# EAGLE board main-2 4x4 (EAGLE 9.6.2), part 1 of 2
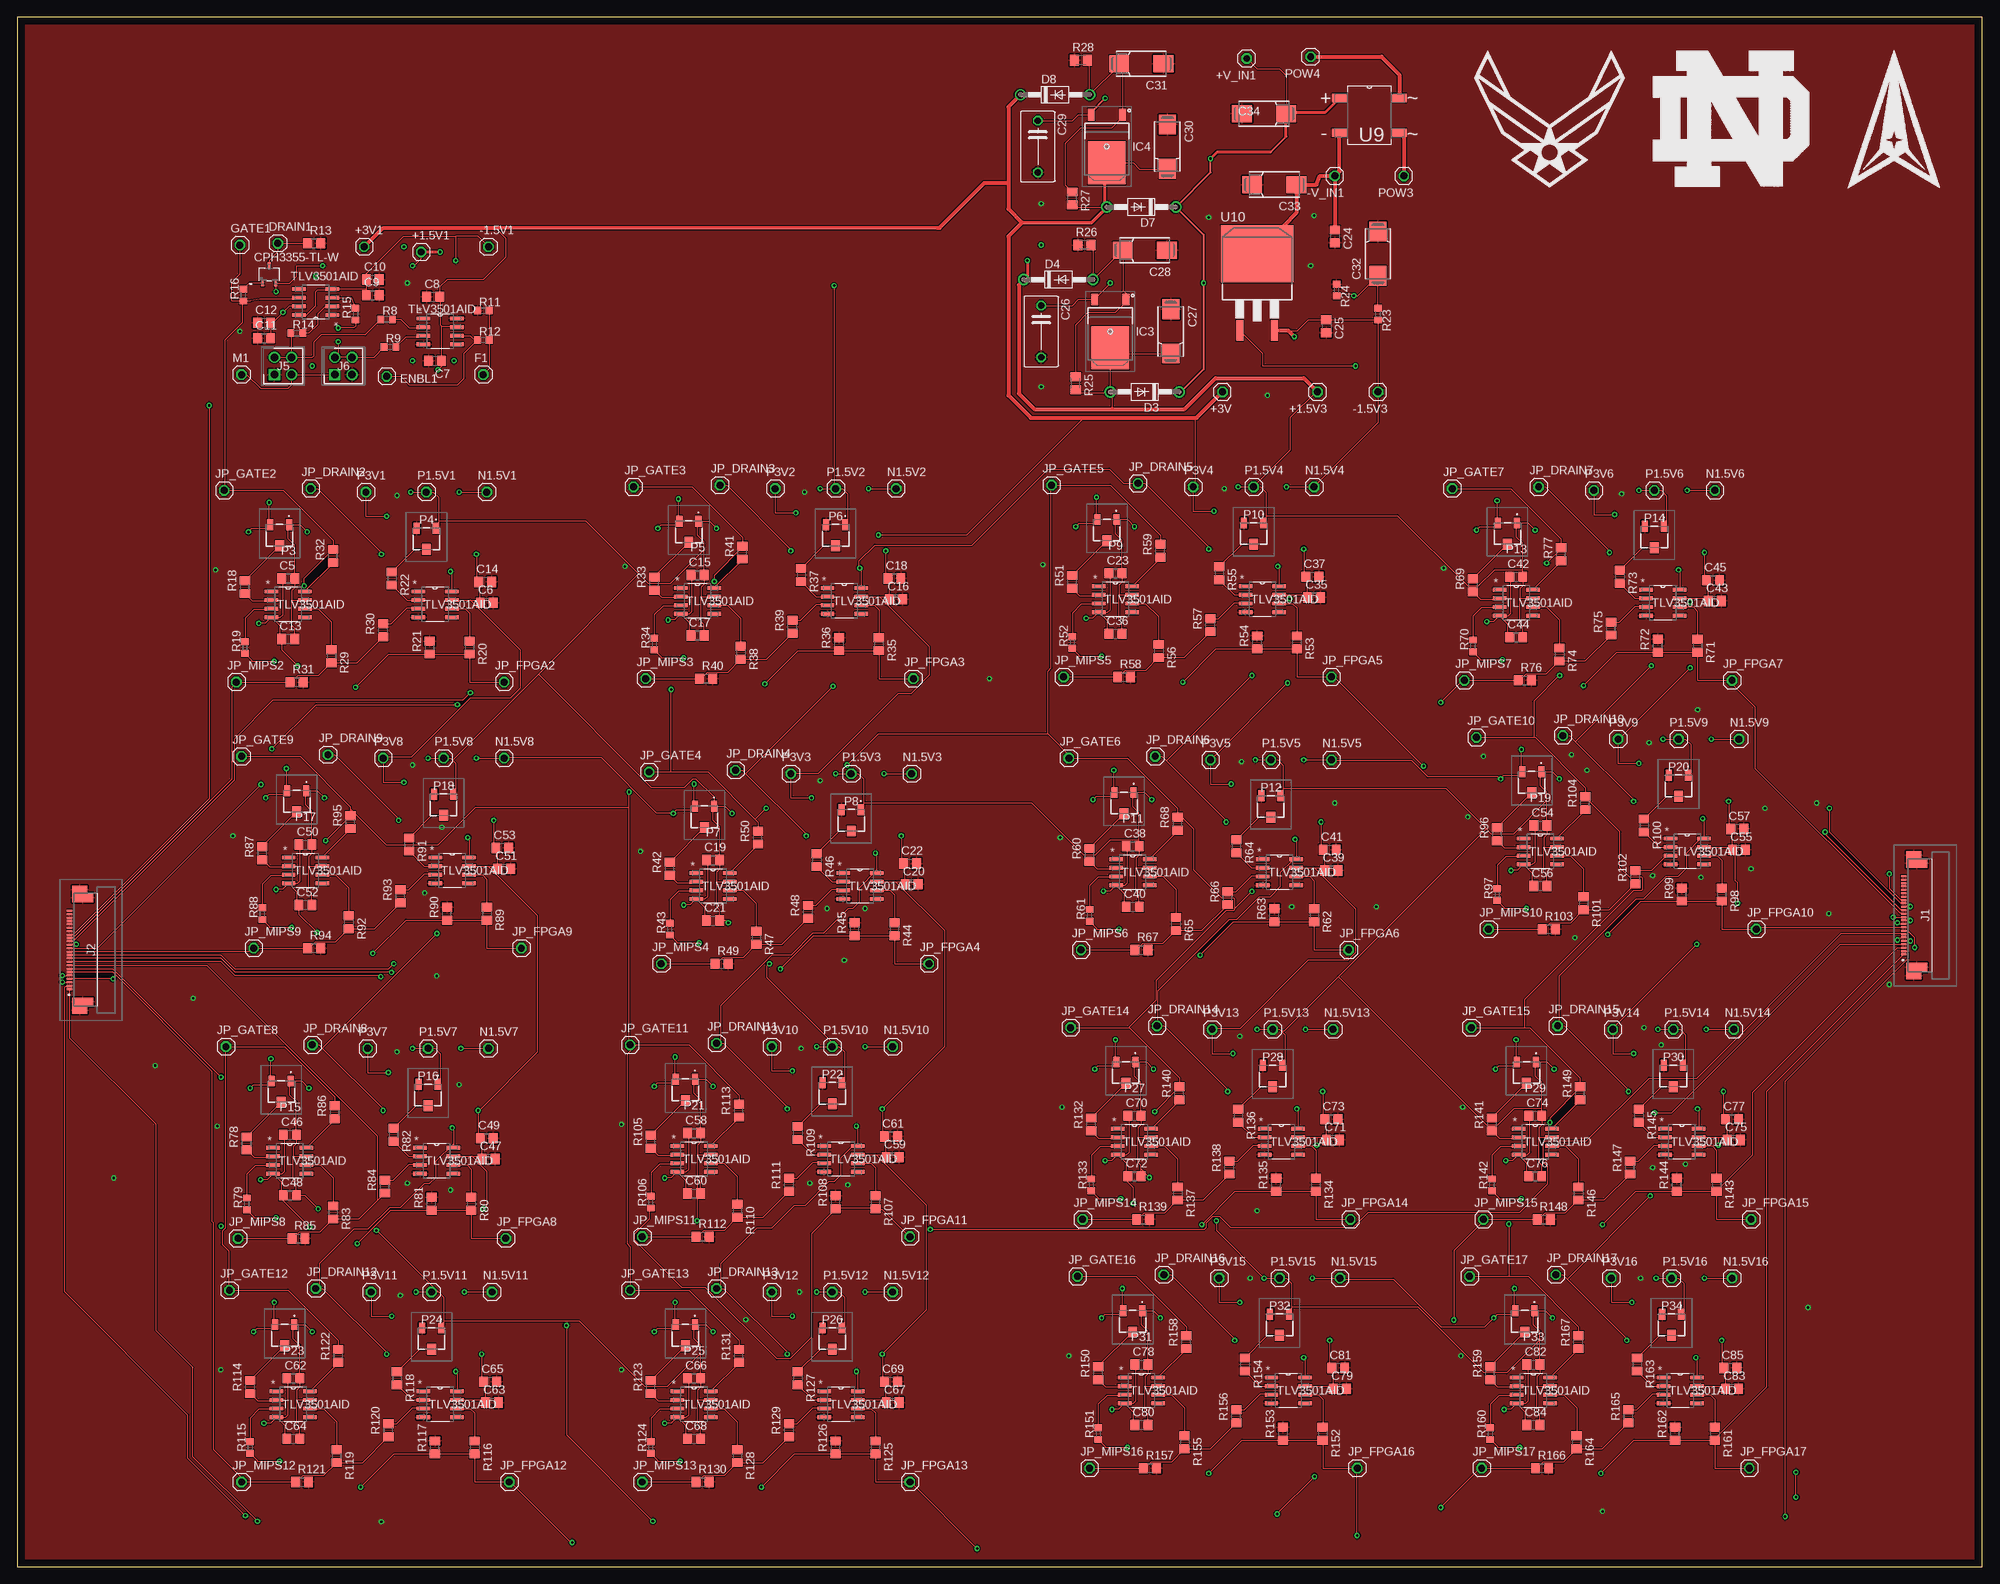
[diagram p0: board, top side]
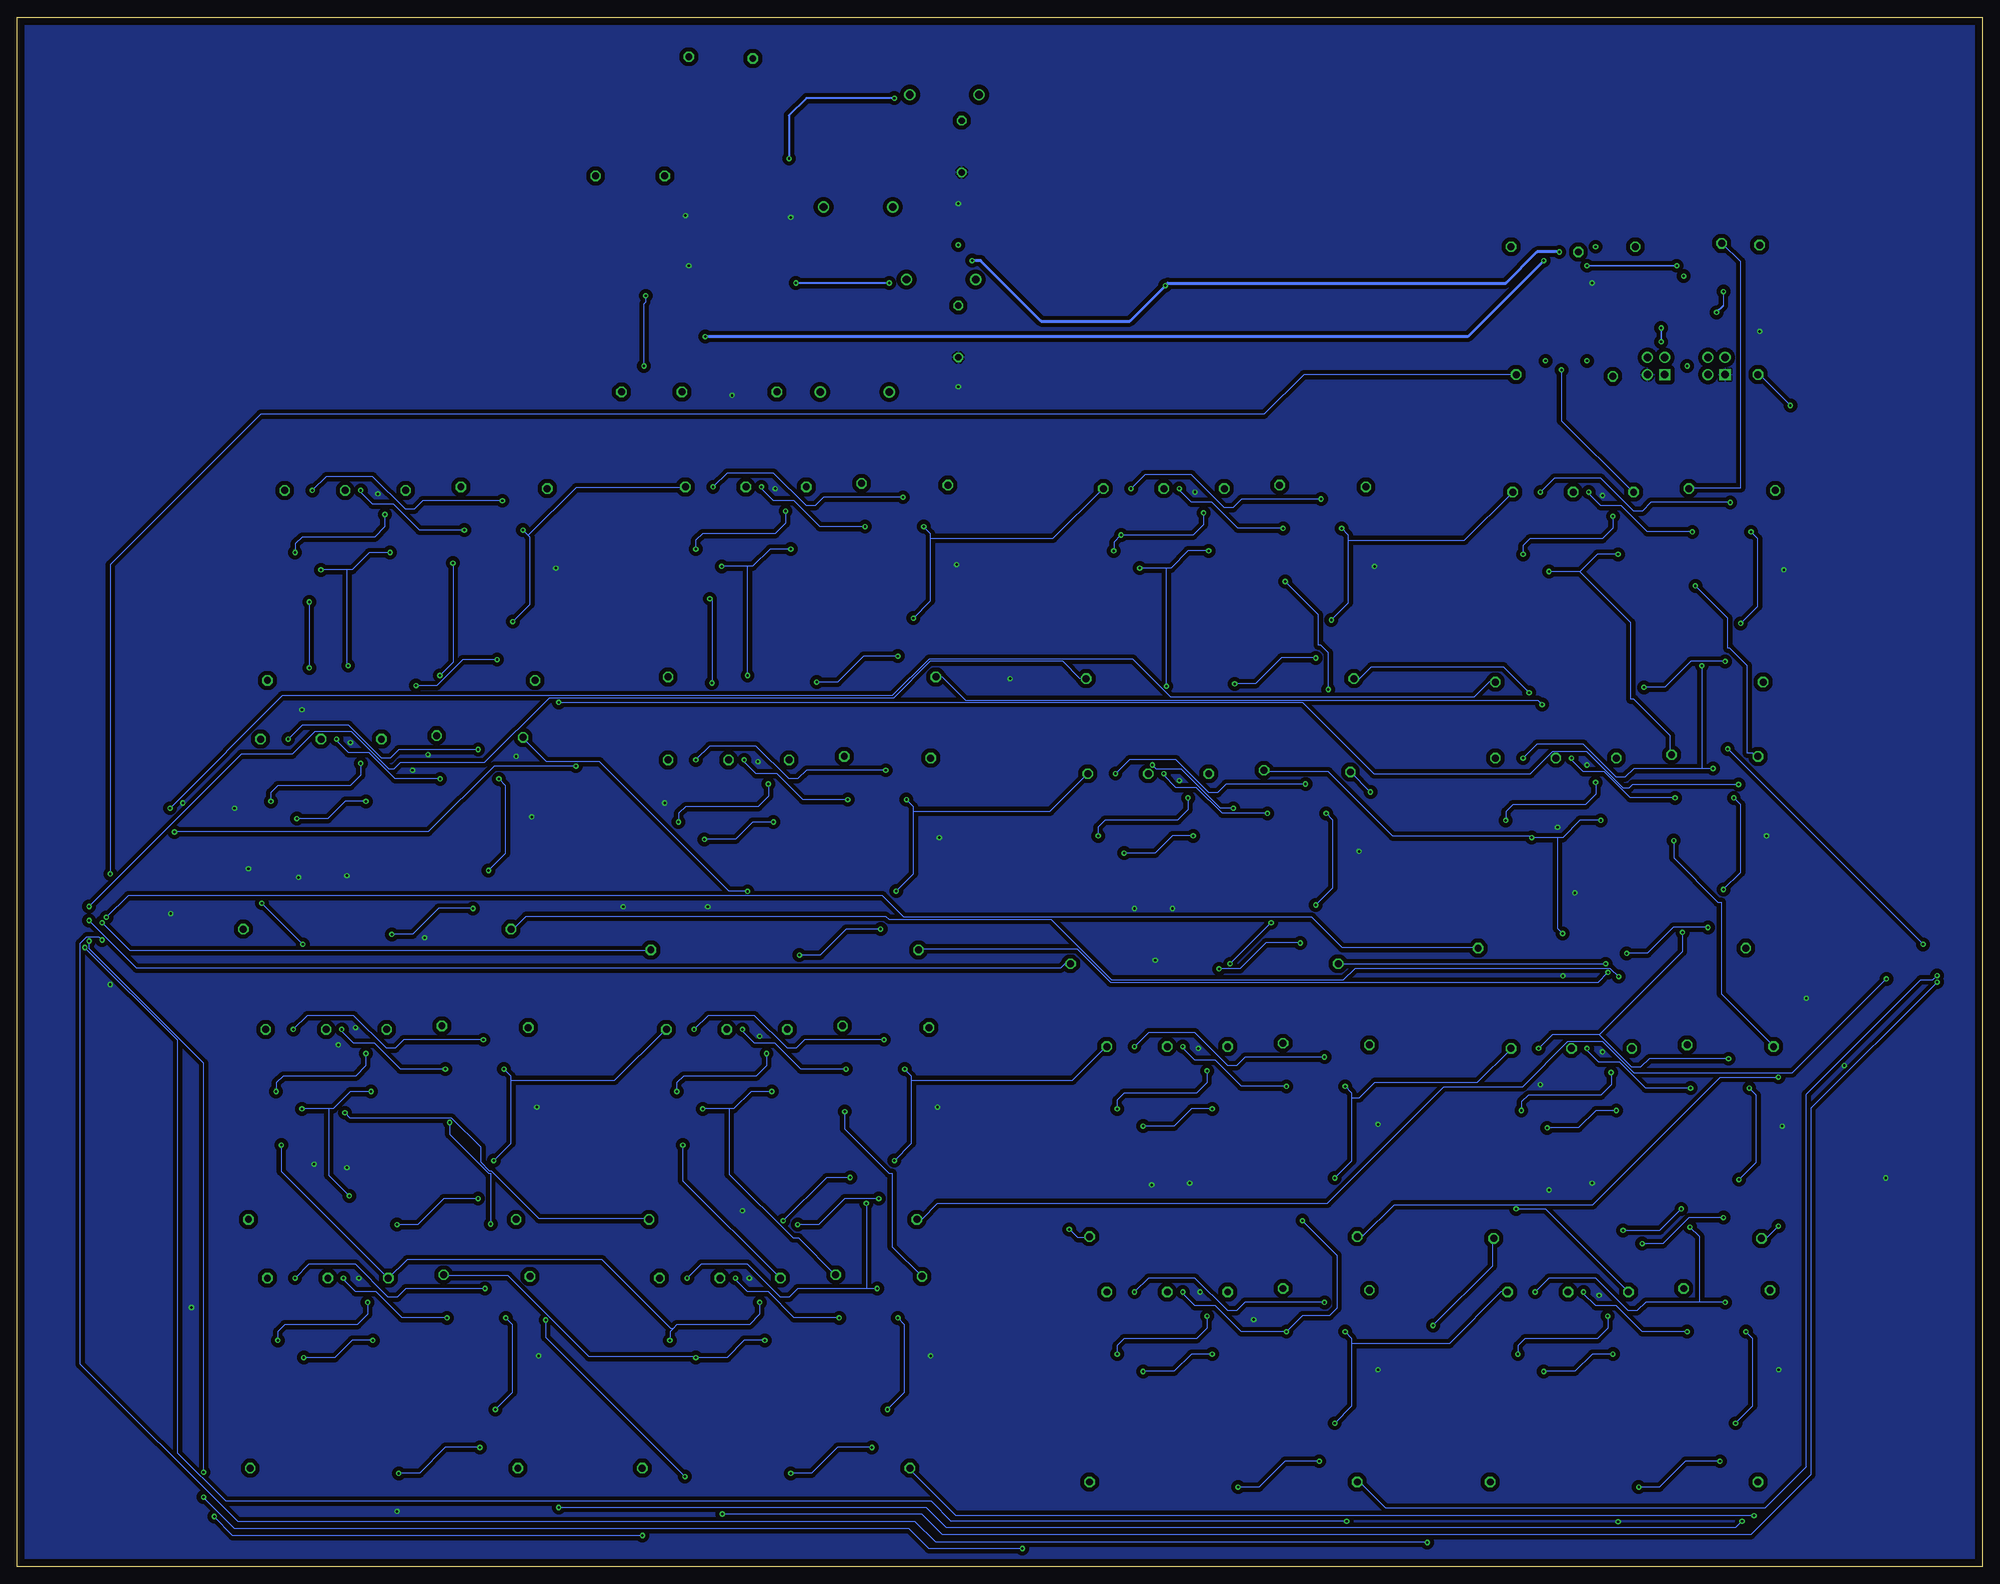
[diagram p1: board, bottom side, seen from below]

Size 289.05 x 227.84 mm. Coordinates in mm from the lower left corner, seen from the top.
Outline: 0,0 289.05,0 289.05,227.84 0,227.84 0,0
Copper layers (1*16): Top 0.035mm / dielectric 1.5mm / Bottom 0.035mm
Design rules "default": minimum track width 6mil, minimum drill 0.35mm, track to track 6mil, track to pad 6mil, pad to pad 6mil, via to via 6mil, smd to smd 6mil, copper to edge 40mil, drill to drill 6mil, minimum pad ring 10mil, minimum via ring 8mil, stop-mask expansion 4mil, vias tented up to drill 0mil, thermal gap 10mil

## Footprints (pad centres in the part's own frame; a part is rotated, then mirrored left to right if it is on the bottom)
1X01 = drill 1.016 octagon: 1 0,0
C0805 = smd 1.3 x 1.5: 1 -0.95,0; 2 0.95,0
C075-052X106 = drill 0.914 octagon: 1 -3.81,0; 2 3.81,0
085CS_1AR = smd 2.9 x 2.5: + 3.25,0; - -3.25,0
DO41-10 = drill 1.118: A 5.08,0; C -5.08,0
TO228P991X238-3N = smd 1.75 x 1: 1 -4.7,2.285; 3 -4.7,-2.285 | smd 6.35 x 5.55: 4 2.4,0
0524372471 = smd 0.3 x 0.8: 1 -5.75,1.925; 2 -5.25,1.925; 3 -4.75,1.925; 4 -4.25,1.925; 5 -3.75,1.925; 6 -3.25,1.925; 7 -2.75,1.925; 8 -2.25,1.925; 9 -1.75,1.925; 10 -1.25,1.925; 11 -0.75,1.925; 12 -0.25,1.925; 13 0.25,1.925; 14 0.75,1.925; 15 1.25,1.925; 16 1.75,1.925; 17 2.25,1.925; 18 2.75,1.925; 19 3.25,1.925; 20 3.75,1.925; 21 4.25,1.925; 22 4.75,1.925; 23 5.25,1.925; 24 5.75,1.925 | smd 1.3 x 3.05: MP1 -7.65,0; MP2 7.65,0 | smd 1.1 x 2.2: MP3 -8.85,0.425; MP4 8.85,0.425
HDRV4W64P254_2X2_521X508X851P = drill 1.1 pad 1.65 square: 1 0,0 | drill 1.1 pad 1.65: 2 0,2.54; 3 2.54,0; 4 2.54,2.54
SM3TW102 = smd 0.9 x 1.6: 1 -1.4,-1.56; 3 1.4,-1.56 | smd 1.3 x 1.6: 2 0,1.56
R0603 = smd 1 x 1.1: 1 -0.85,0; 2 0.85,0
R0805 = smd 1.3 x 1.5: 1 -0.95,0; 2 0.95,0
M0805 = smd 1.3 x 1.6: 1 -0.95,0; 2 0.95,0
D8 = smd 1.981 x 0.559: 1 -2.464,1.905; 2 -2.464,0.635; 3 -2.464,-0.635; 4 -2.464,-1.905; 5 2.464,-1.905; 6 2.464,-0.635; 7 2.464,0.635; 8 2.464,1.905
CPH3_2P9X1P6_ONS = smd 0.457 x 0.914: 1 -0.95,-1.295; 2 0.95,-1.295; 3 0,1.295
SOT508P985X260-4N = smd 2.235 x 1.245: 1 -4.394,2.54; 2 -4.394,-2.54; 3 4.394,-2.54; 4 4.394,2.54
D2PAK-3 = smd 1.016 x 3.05: 1 -2.54,-11.31; 3 2.54,-11.31 | smd 10.66 x 8.38: 4 0,0

## Placement (x,y rotation side)
+1.5V1  [1X01]  59.44,193.29 0 top
+1.5V3  [1X01]  191.26,172.72 180 top
+3V  [1X01]  177.29,172.72 180 top
+3V1  [1X01]  51.05,194.06 0 top
+V_IN1  [1X01]  180.85,221.74 180 top
-1.5V1  [1X01]  69.34,194.06 0 top
-1.5V3  [1X01]  200.15,172.72 180 top
-V_IN1  [1X01]  193.8,204.47 180 top
C5  [C0805]  39.88,145.29 0 top
C6  [C0805]  69.09,141.73 0 top
C7  [C0805]  61.47,177.29 0 top
C8  [C0805]  61.21,186.69 0 top
C9  [C0805]  52.32,186.94 0 top
C10  [C0805]  52.32,189.23 0 top
C11  [C0805]  36.32,180.59 0 top
C12  [C0805]  36.32,182.88 0 top
C13  [C0805]  39.88,136.4 0 top
C14  [C0805]  68.83,144.78 0 top
C15  [C0805]  100.08,145.8 0 top
C16  [C0805]  129.29,142.24 0 top
C17  [C0805]  100.08,136.91 0 top
C18  [C0805]  129.03,145.29 0 top
C19  [C0805]  102.36,103.89 0 top
C20  [C0805]  131.57,100.33 0 top
C21  [C0805]  102.36,95 0 top
C22  [C0805]  131.32,103.38 0 top
C23  [C0805]  161.54,146.05 0 top
C24  10uF  [C0805]  193.8,195.58 270 top
C25  0.1uF  [C0805]  192.53,182.37 270 top
C26  0.1uF  [C075-052X106]  150.62,181.61 270 top
C27  1uF  [085CS_1AR]  169.67,181.61 270 top
C28  10uF  [085CS_1AR]  165.86,193.55 180 top
C29  0.1uF  [C075-052X106]  150.11,208.79 270 top
C30  1uF  [085CS_1AR]  169.16,208.79 270 top
C31  10uF  [085CS_1AR]  165.35,220.98 180 top
C32  1uF  [085CS_1AR]  200.15,193.04 90 top
C33  10uF  [085CS_1AR]  184.91,203.2 180 top
C34  10uF  [085CS_1AR]  183.39,213.61 0 top
C35  [C0805]  190.75,142.49 0 top
C36  [C0805]  161.54,137.16 0 top
C37  [C0805]  190.5,145.54 0 top
C38  [C0805]  164.08,105.92 0 top
C39  [C0805]  193.29,102.36 0 top
C40  [C0805]  164.08,97.03 0 top
C41  [C0805]  193.04,105.41 0 top
C42  [C0805]  220.47,145.54 0 top
C43  [C0805]  249.68,141.99 0 top
C44  [C0805]  220.47,136.65 0 top
C45  [C0805]  249.43,145.03 0 top
C46  [C0805]  40.13,63.5 0 top
C47  [C0805]  69.34,59.94 0 top
C48  [C0805]  40.13,54.61 0 top
C49  [C0805]  69.09,62.99 0 top
C50  [C0805]  42.42,106.17 0 top
C51  [C0805]  71.63,102.62 0 top
C52  [C0805]  42.42,97.28 0 top
C53  [C0805]  71.37,105.66 0 top
C54  [C0805]  224.03,108.97 0 top
C55  [C0805]  253.24,105.41 0 top
C56  [C0805]  224.03,100.08 0 top
C57  [C0805]  252.98,108.46 0 top
C58  [C0805]  99.57,63.75 0 top
C59  [C0805]  128.78,60.2 0 top
C60  [C0805]  99.57,54.86 0 top
C61  [C0805]  128.52,63.25 0 top
C62  [C0805]  40.64,27.69 0 top
C63  [C0805]  69.85,24.13 0 top
C64  [C0805]  40.64,18.8 0 top
C65  [C0805]  69.6,27.18 0 top
C66  [C0805]  99.57,27.69 0 top
C67  [C0805]  128.78,24.13 0 top
C68  [C0805]  99.57,18.8 0 top
C69  [C0805]  128.52,27.18 0 top
C70  [C0805]  164.34,66.29 0 top
C71  [C0805]  193.55,62.74 0 top
C72  [C0805]  164.34,57.4 0 top
C73  [C0805]  193.29,65.79 0 top
C74  [C0805]  223.27,66.29 0 top
C75  [C0805]  252.48,62.74 0 top
C76  [C0805]  223.27,57.4 0 top
C77  [C0805]  252.22,65.79 0 top
C78  [C0805]  165.35,29.72 0 top
C79  [C0805]  194.56,26.16 0 top
C80  [C0805]  165.35,20.83 0 top
C81  [C0805]  194.31,29.21 0 top
C82  [C0805]  223.01,29.72 0 top
C83  [C0805]  252.22,26.16 0 top
C84  [C0805]  223.01,20.83 0 top
C85  [C0805]  251.97,29.21 0 top
D3  1N4002  [DO41-10]  165.86,172.72 180 top
D4  1N4002  [DO41-10]  153.16,189.23 0 top
D7  1N4002  [DO41-10]  165.35,199.9 180 top
D8  1N4002  [DO41-10]  152.65,216.41 0 top
DRAIN1  [1X01]  38.35,194.56 0 top
ENBL1  [1X01]  54.36,175.01 0 top
F1  [1X01]  68.58,175.26 0 top
GATE1  [1X01]  32.77,194.31 0 top
IC3  LM317AMDT_NOPB  [TO228P991X238-3N]  160.78,181.61 270 top
IC4  LM317AMDT_NOPB  [TO228P991X238-3N]  160.27,208.79 270 top
J1  0524372471  [0524372471]  279.4,95.76 90 top
J2  0524372471  [0524372471]  9.65,90.68 90 top
J5  70287-1098  [HDRV4W64P254_2X2_521X508X851P]  37.85,175.26 0 top
J6  70287-1098  [HDRV4W64P254_2X2_521X508X851P]  46.74,175.26 0 top
JP_DRAIN2  [1X01]  43.18,158.5 0 top
JP_DRAIN3  [1X01]  103.38,159 0 top
JP_DRAIN4  [1X01]  105.66,117.09 0 top
JP_DRAIN5  [1X01]  164.85,159.26 0 top
JP_DRAIN6  [1X01]  167.39,119.13 0 top
JP_DRAIN7  [1X01]  223.77,158.75 0 top
JP_DRAIN8  [1X01]  43.43,76.71 0 top
JP_DRAIN9  [1X01]  45.72,119.38 0 top
JP_DRAIN10  [1X01]  227.33,122.17 0 top
JP_DRAIN11  [1X01]  102.87,76.96 0 top
JP_DRAIN12  [1X01]  43.94,40.89 0 top
JP_DRAIN13  [1X01]  102.87,40.89 0 top
JP_DRAIN14  [1X01]  167.64,79.5 0 top
JP_DRAIN15  [1X01]  226.57,79.5 0 top
JP_DRAIN16  [1X01]  168.66,42.93 0 top
JP_DRAIN17  [1X01]  226.31,42.93 0 top
JP_FPGA2  [1X01]  71.63,130.05 0 top
JP_FPGA3  [1X01]  131.83,130.56 0 top
JP_FPGA4  [1X01]  134.11,88.65 0 top
JP_FPGA5  [1X01]  193.29,130.81 0 top
JP_FPGA6  [1X01]  195.83,90.68 0 top
JP_FPGA7  [1X01]  252.22,130.3 0 top
JP_FPGA8  [1X01]  71.88,48.26 0 top
JP_FPGA9  [1X01]  74.17,90.93 0 top
JP_FPGA10  [1X01]  255.78,93.73 0 top
JP_FPGA11  [1X01]  131.32,48.51 0 top
JP_FPGA12  [1X01]  72.39,12.45 0 top
JP_FPGA13  [1X01]  131.32,12.45 0 top
JP_FPGA14  [1X01]  196.09,51.05 0 top
JP_FPGA15  [1X01]  255.02,51.05 0 top
JP_FPGA16  [1X01]  197.1,14.48 0 top
JP_FPGA17  [1X01]  254.76,14.48 0 top
JP_GATE2  [1X01]  30.48,158.24 0 top
JP_GATE3  [1X01]  90.68,158.75 0 top
JP_GATE4  [1X01]  92.96,116.84 0 top
JP_GATE5  [1X01]  152.15,159 0 top
JP_GATE6  [1X01]  154.69,118.87 0 top
JP_GATE7  [1X01]  211.07,158.5 0 top
JP_GATE8  [1X01]  30.73,76.45 0 top
JP_GATE9  [1X01]  33.02,119.13 0 top
JP_GATE10  [1X01]  214.63,121.92 0 top
JP_GATE11  [1X01]  90.17,76.71 0 top
JP_GATE12  [1X01]  31.24,40.64 0 top
JP_GATE13  [1X01]  90.17,40.64 0 top
JP_GATE14  [1X01]  154.94,79.25 0 top
JP_GATE15  [1X01]  213.87,79.25 0 top
JP_GATE16  [1X01]  155.96,42.67 0 top
JP_GATE17  [1X01]  213.61,42.67 0 top
JP_MIPS2  [1X01]  32.26,130.05 0 top
JP_MIPS3  [1X01]  92.46,130.56 0 top
JP_MIPS4  [1X01]  94.74,88.65 0 top
JP_MIPS5  [1X01]  153.92,130.81 0 top
JP_MIPS6  [1X01]  156.46,90.68 0 top
JP_MIPS7  [1X01]  212.85,130.3 0 top
JP_MIPS8  [1X01]  32.51,48.26 0 top
JP_MIPS9  [1X01]  34.8,90.93 0 top
JP_MIPS10  [1X01]  216.41,93.73 0 top
JP_MIPS11  [1X01]  91.95,48.51 0 top
JP_MIPS12  [1X01]  33.02,12.45 0 top
JP_MIPS13  [1X01]  91.95,12.45 0 top
JP_MIPS14  [1X01]  156.72,51.05 0 top
JP_MIPS15  [1X01]  215.65,51.05 0 top
JP_MIPS16  [1X01]  157.73,14.48 0 top
JP_MIPS17  [1X01]  215.39,14.48 0 top
M1  [1X01]  33.02,175.26 0 top
N1.5V1  [1X01]  69.09,157.99 0 top
N1.5V2  [1X01]  129.29,158.5 0 top
N1.5V3  [1X01]  131.57,116.59 0 top
N1.5V4  [1X01]  190.75,158.75 0 top
N1.5V5  [1X01]  193.29,118.62 0 top
N1.5V6  [1X01]  249.68,158.24 0 top
N1.5V7  [1X01]  69.34,76.2 0 top
N1.5V8  [1X01]  71.63,118.87 0 top
N1.5V9  [1X01]  253.24,121.67 0 top
N1.5V10  [1X01]  128.78,76.45 0 top
N1.5V11  [1X01]  69.85,40.39 0 top
N1.5V12  [1X01]  128.78,40.39 0 top
N1.5V13  [1X01]  193.55,78.99 0 top
N1.5V14  [1X01]  252.48,78.99 0 top
N1.5V15  [1X01]  194.56,42.42 0 top
N1.5V16  [1X01]  252.22,42.42 0 top
P1.5V1  [1X01]  60.2,157.99 0 top
P1.5V2  [1X01]  120.4,158.5 0 top
P1.5V3  [1X01]  122.68,116.59 0 top
P1.5V4  [1X01]  181.86,158.75 0 top
P1.5V5  [1X01]  184.4,118.62 0 top
P1.5V6  [1X01]  240.79,158.24 0 top
P1.5V7  [1X01]  60.45,76.2 0 top
P1.5V8  [1X01]  62.74,118.87 0 top
P1.5V9  [1X01]  244.35,121.67 0 top
P1.5V10  [1X01]  119.89,76.45 0 top
P1.5V11  [1X01]  60.96,40.39 0 top
P1.5V12  [1X01]  119.89,40.39 0 top
P1.5V13  [1X01]  184.66,78.99 0 top
P1.5V14  [1X01]  243.59,78.99 0 top
P1.5V15  [1X01]  185.67,42.42 0 top
P1.5V16  [1X01]  243.33,42.42 0 top
P3  SM-3TW102  [SM3TW102]  38.61,151.64 180 top
P3V1  [1X01]  51.31,157.99 0 top
P3V2  [1X01]  111.51,158.5 0 top
P3V3  [1X01]  113.79,116.59 0 top
P3V4  [1X01]  172.97,158.75 0 top
P3V5  [1X01]  175.51,118.62 0 top
P3V6  [1X01]  231.9,158.24 0 top
P3V7  [1X01]  51.56,76.2 0 top
P3V8  [1X01]  53.85,118.87 0 top
P3V9  [1X01]  235.46,121.67 0 top
P3V10  [1X01]  111,76.45 0 top
P3V11  [1X01]  52.07,40.39 0 top
P3V12  [1X01]  111,40.39 0 top
P3V13  [1X01]  175.77,78.99 0 top
P3V14  [1X01]  234.7,78.99 0 top
P3V15  [1X01]  176.78,42.42 0 top
P3V16  [1X01]  234.44,42.42 0 top
P4  SM-3TW102  [SM3TW102]  60.2,151.13 180 top
P5  SM-3TW102  [SM3TW102]  98.81,152.15 180 top
P6  SM-3TW102  [SM3TW102]  120.4,151.64 180 top
P7  SM-3TW102  [SM3TW102]  101.09,110.24 180 top
P8  SM-3TW102  [SM3TW102]  122.68,109.73 180 top
P9  SM-3TW102  [SM3TW102]  160.27,152.4 180 top
P10  SM-3TW102  [SM3TW102]  181.86,151.89 180 top
P11  SM-3TW102  [SM3TW102]  162.81,112.27 180 top
P12  SM-3TW102  [SM3TW102]  184.4,111.76 180 top
P13  SM-3TW102  [SM3TW102]  219.2,151.89 180 top
P14  SM-3TW102  [SM3TW102]  240.79,151.38 180 top
P15  SM-3TW102  [SM3TW102]  38.86,69.85 180 top
P16  SM-3TW102  [SM3TW102]  60.45,69.34 180 top
P17  SM-3TW102  [SM3TW102]  41.15,112.52 180 top
P18  SM-3TW102  [SM3TW102]  62.74,112.01 180 top
P19  SM-3TW102  [SM3TW102]  222.76,115.32 180 top
P20  SM-3TW102  [SM3TW102]  244.35,114.81 180 top
P21  SM-3TW102  [SM3TW102]  98.3,70.1 180 top
P22  SM-3TW102  [SM3TW102]  119.89,69.6 180 top
P23  SM-3TW102  [SM3TW102]  39.37,34.04 180 top
P24  SM-3TW102  [SM3TW102]  60.96,33.53 180 top
P25  SM-3TW102  [SM3TW102]  98.3,34.04 180 top
P26  SM-3TW102  [SM3TW102]  119.89,33.53 180 top
P27  SM-3TW102  [SM3TW102]  163.07,72.64 180 top
P28  SM-3TW102  [SM3TW102]  184.66,72.14 180 top
P29  SM-3TW102  [SM3TW102]  222,72.64 180 top
P30  SM-3TW102  [SM3TW102]  243.59,72.14 180 top
P31  SM-3TW102  [SM3TW102]  164.08,36.07 180 top
P32  SM-3TW102  [SM3TW102]  185.67,35.56 180 top
P33  SM-3TW102  [SM3TW102]  221.74,36.07 180 top
P34  SM-3TW102  [SM3TW102]  243.33,35.56 180 top
POW3  [1X01]  203.96,204.47 180 top
POW4  [1X01]  190.25,222 180 top
R8  220  [R0603]  54.36,183.39 0 top
R9  220  [R0603]  54.86,179.32 0 top
R11  220  [R0603]  68.58,184.66 0 top
R12  220  [R0603]  68.58,180.34 0 top
R13  51  [R0805]  43.69,194.56 0 top
R14  220  [R0603]  41.15,181.36 0 top
R15  220  [R0603]  49.78,184.15 90 top
R16  220  [R0603]  33.27,186.94 90 top
R18  130  [R0805]  33.53,144.02 90 top
R19  130  [R0603]  33.53,135.13 90 top
R20  220  [R0805]  66.55,135.13 270 top
R21  220  [R0805]  60.71,135.13 90 top
R22  130  [R0805]  55.12,145.29 270 top
R23  240  [R0603]  200.15,184.15 270 top
R24  49.9  [R0603]  194.06,187.71 270 top
R25  240Ω  [M0805]  155.7,173.99 270 top
R26  49Ω  [M0805]  156.97,194.31 0 top
R27  240Ω  [M0805]  155.19,201.17 270 top
R28  390Ω  [M0805]  156.46,221.49 0 top
R29  220  [R0805]  46.23,133.86 270 top
R30  130  [R0805]  53.85,137.67 90 top
R31  220  [R0805]  41.15,130.05 0 top
R32  220  [R0805]  46.48,148.59 90 top
R33  130  [R0805]  93.73,144.53 90 top
R34  130  [R0603]  93.73,135.64 90 top
R35  220  [R0805]  126.75,135.64 270 top
R36  220  [R0805]  120.9,135.64 90 top
R37  130  [R0805]  115.32,145.8 270 top
R38  220  [R0805]  106.43,134.37 270 top
R39  130  [R0805]  114.05,138.18 90 top
R40  220  [R0805]  101.35,130.56 0 top
R41  220  [R0805]  106.68,149.1 90 top
R42  130  [R0805]  96.01,102.62 90 top
R43  130  [R0603]  96.01,93.73 90 top
R44  220  [R0805]  129.03,93.73 270 top
R45  220  [R0805]  123.19,93.73 90 top
R46  130  [R0805]  117.6,103.89 270 top
R47  220  [R0805]  108.71,92.46 270 top
R48  130  [R0805]  116.33,96.27 90 top
R49  220  [R0805]  103.63,88.65 0 top
R50  220  [R0805]  108.97,107.19 90 top
R51  130  [R0805]  155.19,144.78 90 top
R52  130  [R0603]  155.19,135.89 90 top
R53  220  [R0805]  188.21,135.89 270 top
R54  220  [R0805]  182.37,135.89 90 top
R55  130  [R0805]  176.78,146.05 270 top
R56  220  [R0805]  167.89,134.62 270 top
R57  130  [R0805]  175.51,138.43 90 top
R58  220  [R0805]  162.81,130.81 0 top
R59  220  [R0805]  168.15,149.35 90 top
R60  130  [R0805]  157.73,104.65 90 top
R61  130  [R0603]  157.73,95.76 90 top
R62  220  [R0805]  190.75,95.76 270 top
R63  220  [R0805]  184.91,95.76 90 top
R64  130  [R0805]  179.32,105.92 270 top
R65  220  [R0805]  170.43,94.49 270 top
R66  130  [R0805]  178.05,98.3 90 top
R67  220  [R0805]  165.35,90.68 0 top
R68  220  [R0805]  170.69,109.22 90 top
R69  130  [R0805]  214.12,144.27 90 top
R70  130  [R0603]  214.12,135.38 90 top
R71  220  [R0805]  247.14,135.38 270 top
R72  220  [R0805]  241.3,135.38 90 top
R73  130  [R0805]  235.71,145.54 270 top
R74  220  [R0805]  226.82,134.11 270 top
R75  130  [R0805]  234.44,137.92 90 top
R76  220  [R0805]  221.74,130.3 0 top
R77  220  [R0805]  227.08,148.84 90 top
R78  130  [R0805]  33.78,62.23 90 top
R79  130  [R0603]  33.78,53.34 90 top
R80  220  [R0805]  66.8,53.34 270 top
R81  220  [R0805]  60.96,53.34 90 top
R82  130  [R0805]  55.37,63.5 270 top
R83  220  [R0805]  46.48,52.07 270 top
R84  130  [R0805]  54.1,55.88 90 top
R85  220  [R0805]  41.4,48.26 0 top
R86  220  [R0805]  46.74,66.8 90 top
R87  130  [R0805]  36.07,104.9 90 top
R88  130  [R0603]  36.07,96.01 90 top
R89  220  [R0805]  69.09,96.01 270 top
R90  220  [R0805]  63.25,96.01 90 top
R91  130  [R0805]  57.66,106.17 270 top
R92  220  [R0805]  48.77,94.74 270 top
R93  130  [R0805]  56.39,98.55 90 top
R94  220  [R0805]  43.69,90.93 0 top
R95  220  [R0805]  49.02,109.47 90 top
R96  130  [R0805]  217.68,107.7 90 top
R97  130  [R0603]  217.68,98.81 90 top
R98  220  [R0805]  250.7,98.81 270 top
R99  220  [R0805]  244.86,98.81 90 top
R100  130  [R0805]  239.27,108.97 270 top
R101  220  [R0805]  230.38,97.54 270 top
R102  130  [R0805]  238,101.35 90 top
R103  220  [R0805]  225.3,93.73 0 top
R104  220  [R0805]  230.63,112.27 90 top
R105  130  [R0805]  93.22,62.48 90 top
R106  130  [R0603]  93.22,53.59 90 top
R107  220  [R0805]  126.24,53.59 270 top
R108  220  [R0805]  120.4,53.59 90 top
R109  130  [R0805]  114.81,63.75 270 top
R110  220  [R0805]  105.92,52.32 270 top
R111  130  [R0805]  113.54,56.13 90 top
R112  220  [R0805]  100.84,48.51 0 top
R113  220  [R0805]  106.17,67.06 90 top
R114  130  [R0805]  34.29,26.42 90 top
R115  130  [R0603]  34.29,17.53 90 top
R116  220  [R0805]  67.31,17.53 270 top
R117  220  [R0805]  61.47,17.53 90 top
R118  130  [R0805]  55.88,27.69 270 top
R119  220  [R0805]  46.99,16.26 270 top
R120  130  [R0805]  54.61,20.07 90 top
R121  220  [R0805]  41.91,12.45 0 top
R122  220  [R0805]  47.24,30.99 90 top
R123  130  [R0805]  93.22,26.42 90 top
R124  130  [R0603]  93.22,17.53 90 top
R125  220  [R0805]  126.24,17.53 270 top
R126  220  [R0805]  120.4,17.53 90 top
R127  130  [R0805]  114.81,27.69 270 top
R128  220  [R0805]  105.92,16.26 270 top
R129  130  [R0805]  113.54,20.07 90 top
R130  220  [R0805]  100.84,12.45 0 top
R131  220  [R0805]  106.17,30.99 90 top
R132  130  [R0805]  157.99,65.02 90 top
R133  130  [R0603]  157.99,56.13 90 top
R134  220  [R0805]  191.01,56.13 270 top
R135  220  [R0805]  185.17,56.13 90 top
R136  130  [R0805]  179.58,66.29 270 top
R137  220  [R0805]  170.69,54.86 270 top
R138  130  [R0805]  178.31,58.67 90 top
R139  220  [R0805]  165.61,51.05 0 top
R140  220  [R0805]  170.94,69.6 90 top
R141  130  [R0805]  216.92,65.02 90 top
R142  130  [R0603]  216.92,56.13 90 top
R143  220  [R0805]  249.94,56.13 270 top
R144  220  [R0805]  244.09,56.13 90 top
R145  130  [R0805]  238.51,66.29 270 top
R146  220  [R0805]  229.62,54.86 270 top
R147  130  [R0805]  237.24,58.67 90 top
R148  220  [R0805]  224.54,51.05 0 top
R149  220  [R0805]  229.87,69.6 90 top
R150  130  [R0805]  159,28.45 90 top
R151  130  [R0603]  159,19.56 90 top
R152  220  [R0805]  192.02,19.56 270 top
R153  220  [R0805]  186.18,19.56 90 top
R154  130  [R0805]  180.59,29.72 270 top
R155  220  [R0805]  171.7,18.29 270 top
R156  130  [R0805]  179.32,22.1 90 top
R157  220  [R0805]  166.62,14.48 0 top
R158  220  [R0805]  171.96,33.02 90 top
R159  130  [R0805]  216.66,28.45 90 top
R160  130  [R0603]  216.66,19.56 90 top
R161  220  [R0805]  249.68,19.56 270 top
R162  220  [R0805]  243.84,19.56 90 top
R163  130  [R0805]  238.25,29.72 270 top
R164  220  [R0805]  229.36,18.29 270 top
R165  130  [R0805]  236.98,22.1 90 top
R166  220  [R0805]  224.28,14.48 0 top
R167  220  [R0805]  229.62,33.02 90 top
U3  TLV3501AID  [D8]  39.88,141.48 0 top
U4  CPH3355-TL-W  [CPH3_2P9X1P6_ONS]  37.08,189.99 0 top
U5  TLV3501AID  [D8]  62.23,181.61 0 top
U6  TLV3501AID  [D8]  43.94,185.93 180 top
U7  TLV3501AID  [D8]  61.47,141.48 0 top
U8  TLV3501AID  [D8]  100.08,141.99 0 top
U9  DF10S  [SOT508P985X260-4N]  198.88,213.36 0 top
U10  MC79GENERICD2T  [D2PAK-3]  182.37,193.04 0 top
U11  TLV3501AID  [D8]  121.67,141.99 0 top
U12  TLV3501AID  [D8]  102.36,100.08 0 top
U13  TLV3501AID  [D8]  123.95,100.08 0 top
U14  TLV3501AID  [D8]  161.54,142.24 0 top
U15  TLV3501AID  [D8]  183.13,142.24 0 top
U16  TLV3501AID  [D8]  164.08,102.11 0 top
U17  TLV3501AID  [D8]  185.67,102.11 0 top
U18  TLV3501AID  [D8]  220.47,141.73 0 top
U19  TLV3501AID  [D8]  242.06,141.73 0 top
U20  TLV3501AID  [D8]  40.13,59.69 0 top
U21  TLV3501AID  [D8]  61.72,59.69 0 top
U22  TLV3501AID  [D8]  42.42,102.36 0 top
U23  TLV3501AID  [D8]  64.01,102.36 0 top
U24  TLV3501AID  [D8]  224.03,105.16 0 top
U25  TLV3501AID  [D8]  245.62,105.16 0 top
U26  TLV3501AID  [D8]  99.57,59.94 0 top
U27  TLV3501AID  [D8]  121.16,59.94 0 top
U28  TLV3501AID  [D8]  40.64,23.88 0 top
U29  TLV3501AID  [D8]  62.23,23.88 0 top
U30  TLV3501AID  [D8]  99.57,23.88 0 top
U31  TLV3501AID  [D8]  121.16,23.88 0 top
U32  TLV3501AID  [D8]  164.34,62.48 0 top
U33  TLV3501AID  [D8]  185.93,62.48 0 top
U34  TLV3501AID  [D8]  223.27,62.48 0 top
U35  TLV3501AID  [D8]  244.86,62.48 0 top
U36  TLV3501AID  [D8]  165.35,25.91 0 top
U37  TLV3501AID  [D8]  186.94,25.91 0 top
U38  TLV3501AID  [D8]  223.01,25.91 0 top
U39  TLV3501AID  [D8]  244.6,25.91 0 top

## Library data of the parts
+1.5V1 +1.5V3 +3V +3V1 +V_IN1 -1.5V1 -1.5V3 -V_IN1 DRAIN1 ENBL1 F1 GATE1 JP_DRAIN2-JP_DRAIN17 JP_FPGA2-JP_FPGA17 JP_GATE2-JP_GATE17 JP_MIPS2-JP_MIPS17 M1 N1.5V1-N1.5V16 P1.5V1-P1.5V16 P3V1-P3V16 POW3 POW4 = pinhead
C5-C26 C29 C35-C85 = rcl; SPICEPREFIX: C
C27 C28 C30-C34 R25-R28 = resistor
D3 D4 D7 D8 = diode
IC3 IC4 = LM317AMDT_NOPB; DESCRIPTION: 1% Accurate, 1.5A Adjustable Linear Regulator with Short Circuit Protection; HEIGHT: 2.38mm; MANUFACTURER_NAME: Texas Instruments; MANUFACTURER_PART_NUMBER: LM317AMDT/NOPB; MOUSER_PART_NUMBER: 926-LM317AMDT/NOPB; MOUSER_PRICE-STOCK: https://www.mouser.co.uk/ProductDetail/Texas-Instruments/LM317AMDT-NOPB?qs=X1J7HmVL2ZHvM%2FHpkMbGJg%3D%3D
J1 J2 = 0524372471; ARROW_PART_NUMBER: 0524372471; ARROW_PRICE-STOCK: https://www.arrow.com/en/products/0524372471/molex; DESCRIPTION: Conn FPC Connector SKT 24 POS 0.5mm Solder RA SMD Easy-On T/R; HEIGHT: 2.2mm; MANUFACTURER_NAME: Molex; MANUFACTURER_PART_NUMBER: 0524372471; MOUSER_PART_NUMBER: N/A; MOUSER_PRICE-STOCK: https://www.mouser.co.uk/ProductDetail/Molex/0524372471?qs=PBcRNPEHKspMGfgyTEmuOQ%3D%3D
J5 J6 = 70287-1098; DESCRIPTION: Headers & Wire Housings CGrid Bkwy Hdr DR Rt DR RtPn 15''SAu 4Ckt; HEIGHT: 8.51mm; MANUFACTURER_NAME: Molex; MANUFACTURER_PART_NUMBER: 70287-1098; MOUSER_PART_NUMBER: 538-70287-1098; MOUSER_PRICE-STOCK: https://www.mouser.co.uk/ProductDetail/Molex/70287-1098?qs=kYQSPAH4sJyJ%2F7vCw3ffjg%3D%3D
P3-P34 = SM-3TW102; DESCRIPTION: Trimmer Resistors - SMD 1 KW 3mm SMD multi turn J-lead, top adj., 11 turn; HEIGHT: 4.5mm; MANUFACTURER_NAME: NIDEC COPAL; MANUFACTURER_PART_NUMBER: SM-3TW102; MOUSER_PART_NUMBER: 229-SM-3TW102; MOUSER_PRICE-STOCK: https://www.mouser.co.uk/ProductDetail/Nidec-Copal/SM-3TW102?qs=XeJtXLiO41QfszlUsJazpw%3D%3D
R8 R9 R11-R16 R18-R24 R29-R167 = rcl; SPICEPREFIX: R
U3 U5-U8 U11-U39 = TLV3501; COPYRIGHT: Copyright (C) 2022 Ultra Librarian. All rights reserved.; DIGI-KEY_PART_NUMBER_1: 296-17921-5-ND; DIGI-KEY_PART_NUMBER_2: 2156-TLV3501AID-ND; MANUFACTURER_PART_NUMBER: TLV3501AID; MFR_NAME: Texas Instruments
U4 = CPH3355; COPYRIGHT: Copyright (C) 2022 Ultra Librarian. All rights reserved.; DIGI-KEY_PART_NUMBER_1: CPH3355-TL-WOSTR-ND; DIGI-KEY_PART_NUMBER_2: CPH3355-TL-WOSCT-ND; DIGI-KEY_PART_NUMBER_3: CPH3355-TL-WOSDKR-ND; MANUFACTURER_PART_NUMBER: CPH3355-TL-W; MFR_NAME: onsemi
U9 = DF10S; DESCRIPTION: Bridge Rectifier Single Phase Standard 1 kV Surface Mount 4-SDIP; DIGI-KEY_PART_NUMBER: DF10STR-ND; MF: ON; MP: DF10S; PACKAGE: SMD-4 ON; PURCHASE-URL: https://pricing.snapeda.com/search/part/DF10S/?ref=eda
U10 = _hhn_78xx_79xx_NCV78xx_d2pak_dpak

## Nets
+1.5V: +1.5V1.1 +1.5V3.1 C5.2 C11.2 C12.2 C13.2 C15.2 C17.2 C19.2 C21.2 C23.2 C27.+ C36.2 C38.2 C40.2 C42.2 C44.2 C46.2 C48.2 C50.2 C52.2 C54.2 C56.2 C58.2 C60.2 C62.2 C64.2 C66.2 C68.2 C70.2 C72.2 C74.2 C76.2 C78.2 C80.2 C82.2 C84.2 D3.A D4.C IC3.4 P1.5V1.1 P1.5V2.1 P1.5V3.1 P1.5V4.1 P1.5V5.1 P1.5V6.1 P1.5V7.1 P1.5V8.1 P1.5V9.1 P1.5V10.1 P1.5V11.1 P1.5V12.1 P1.5V13.1 P1.5V14.1 P1.5V15.1 P1.5V16.1 P3.1 P4.1 P5.1 P6.1 P7.1 P8.1 P9.1 P10.1 P11.1 P12.1 P13.1 P14.1 P15.1 P16.1 P17.1 P18.1 P19.1 P20.1 P21.1 P22.1 P23.1 P24.1 P25.1 P26.1 P27.1 P28.1 P29.1 P30.1 P31.1 P32.1 P33.1 P34.1 R25.2 U3.7 U4.2 U6.7 U8.7 U12.7 U14.7 U16.7 U18.7 U20.7 U22.7 U24.7 U26.7 U28.7 U30.7 U32.7 U34.7 U36.7 U38.7
+3V: +3V1.1 +3V.1 C6.1 C7.2 C8.2 C14.1 C16.1 C18.1 C20.1 C22.1 C30.+ C35.1 C37.1 C39.1 C41.1 C43.1 C45.1 C47.1 C49.1 C51.1 C53.1 C55.1 C57.1 C59.1 C61.1 C63.1 C65.1 C67.1 C69.1 C71.1 C73.1 C75.1 C77.1 C79.1 C81.1 C83.1 C85.1 D7.A D8.C IC4.4 P3V1.1 P3V2.1 P3V3.1 P3V4.1 P3V5.1 P3V6.1 P3V7.1 P3V8.1 P3V9.1 P3V10.1 P3V11.1 P3V12.1 P3V13.1 P3V14.1 P3V15.1 P3V16.1 R27.2 U5.7 U7.7 U11.7 U13.7 U15.7 U17.7 U19.7 U21.7 U23.7 U25.7 U27.7 U29.7 U31.7 U33.7 U35.7 U37.7 U39.7
-1.5V: -1.5V1.1 -1.5V3.1 C5.1 C9.1 C10.1 C13.1 C15.1 C17.1 C19.1 C21.1 C23.1 C25.1 C36.1 C38.1 C40.1 C42.1 C44.1 C46.1 C48.1 C50.1 C52.1 C54.1 C56.1 C58.1 C60.1 C62.1 C64.1 C66.1 C68.1 C70.1 C72.1 C74.1 C76.1 C78.1 C80.1 C82.1 C84.1 N1.5V1.1 N1.5V2.1 N1.5V3.1 N1.5V4.1 N1.5V5.1 N1.5V6.1 N1.5V7.1 N1.5V8.1 N1.5V9.1 N1.5V10.1 N1.5V11.1 N1.5V12.1 N1.5V13.1 N1.5V14.1 N1.5V15.1 N1.5V16.1 P3.3 P5.3 P7.3 P9.3 P11.3 P13.3 P15.3 P17.3 P19.3 P21.3 P23.3 P25.3 P27.3 P29.3 P31.3 P33.3 R23.2 U3.4 U6.4 U6.8 U8.4 U10.3 U12.4 U14.4 U16.4 U18.4 U20.4 U22.4 U24.4 U26.4 U28.4 U30.4 U32.4 U34.4 U36.4 U38.4
DIR_GATE: GATE1.1 JP_GATE2.1 JP_GATE3.1 JP_GATE4.1 JP_GATE5.1 JP_GATE6.1 JP_GATE7.1 JP_GATE8.1 JP_GATE9.1 JP_GATE10.1 JP_GATE11.1 JP_GATE12.1 JP_GATE13.1 JP_GATE14.1 JP_GATE15.1 JP_GATE16.1 JP_GATE17.1 R16.1 R32.2 R41.2 R50.2 R59.2 R68.2 R77.2 R86.2 R95.2 R104.2 R113.2 R122.2 R131.2 R140.2 R149.2 R158.2 R167.2 U6.6
F1: J1.1 JP_FPGA17.1 R160.1 R161.2 R162.1
F2: J1.2 JP_FPGA16.1 R151.1 R152.2 R153.1
F3: J1.3 JP_FPGA15.1 R142.1 R143.2 R144.1
F4: J1.4 JP_FPGA14.1 R133.1 R134.2 R135.1
F5: J1.5 JP_FPGA13.1 R124.1 R125.2 R126.1
F6: J1.6 JP_FPGA12.1 R115.1 R116.2 R117.1
F7: J1.7 JP_FPGA11.1 R106.1 R107.2 R108.1
F8: J1.8 JP_FPGA8.1 R79.1 R80.2 R81.1
F9: J1.9 JP_FPGA10.1 R97.1 R98.2 R99.1
F10: J1.10 JP_FPGA6.1 R61.1 R62.2 R63.1
F11: J1.11 JP_FPGA4.1 R43.1 R44.2 R45.1
F12: J1.12 JP_FPGA9.1 R88.1 R89.2 R90.1
F13: J1.13 JP_FPGA7.1 R70.1 R71.2 R72.1
F14: J1.14 JP_FPGA5.1 R52.1 R53.2 R54.1
F15: J1.15 JP_FPGA3.1 R34.1 R35.2 R36.1
F16: J1.16 JP_FPGA2.1 R19.1 R20.2 R21.1
F17: F1.1 J1.17 R11.2 R12.2
GND: C6.2 C7.1 C8.1 C9.2 C10.2 C11.1 C12.1 C14.2 C16.2 C18.2 C20.2 C22.2 C24.2 C25.2 C26.2 C27.- C28.- C29.2 C30.- C31.- C32.+ C33.+ C34.- C35.2 C37.2 C39.2 C41.2 C43.2 C45.2 C47.2 C49.2 C51.2 C53.2 C55.2 C57.2 C59.2 C61.2 C63.2 C65.2 C67.2 C69.2 C71.2 C73.2 C75.2 C77.2 C79.2 C81.2 C83.2 C85.2 J1.MP1 J1.MP2 J1.MP3 J1.MP4 J2.MP1 J2.MP2 J2.MP3 J2.MP4 J5.1 J6.3 P4.3 P6.3 P8.3 P10.3 P12.3 P14.3 P16.3 P18.3 P20.3 P22.3 P24.3 P26.3 P28.3 P30.3 P32.3 P34.3 R11.1 R13.2 R21.2 R24.1 R26.1 R28.1 R31.2 R36.2 R40.2 R45.2 R49.2 R54.2 R58.2 R63.2 R67.2 R72.2 R76.2 R81.2 R85.2 R90.2 R94.2 R99.2 R103.2 R108.2 R112.2 R117.2 R121.2 R126.2 R130.2 R135.2 R139.2 R144.2 R148.2 R153.2 R157.2 R162.2 R166.2 U5.4 U5.8 U7.4 U11.4 U13.4 U15.4 U17.4 U19.4 U21.4 U23.4 U25.4 U27.4 U29.4 U31.4 U33.4 U35.4 U37.4 U39.4
IN_2: POW3.1 U9.3
INPPOS1: +V_IN1.1 C26.1 C29.1 C34.+ D3.C D7.C IC3.3 IC4.3 U9.1
INV_DIR_DRAIN: DRAIN1.1 JP_DRAIN2.1 JP_DRAIN3.1 JP_DRAIN4.1 JP_DRAIN5.1 JP_DRAIN6.1 JP_DRAIN7.1 JP_DRAIN8.1 JP_DRAIN9.1 JP_DRAIN10.1 JP_DRAIN11.1 JP_DRAIN12.1 JP_DRAIN13.1 JP_DRAIN14.1 JP_DRAIN15.1 JP_DRAIN16.1 JP_DRAIN17.1 R13.1 U4.3 U7.8 U11.8 U13.8 U15.8 U17.8 U19.8 U21.8 U23.8 U25.8 U27.8 U29.8 U31.8 U33.8 U35.8 U37.8 U39.8
M1: J2.1 JP_MIPS17.1 R164.2 R165.1 R166.1
M2: J2.2 JP_MIPS16.1 R155.2 R156.1 R157.1
M3: J2.3 JP_MIPS15.1 R146.2 R147.1 R148.1
M4: J2.4 JP_MIPS14.1 R137.2 R138.1 R139.1
M5: J2.5 JP_MIPS13.1 R128.2 R129.1 R130.1
M6: J2.6 JP_MIPS12.1 R119.2 R120.1 R121.1
M7: J2.7 JP_MIPS11.1 R110.2 R111.1 R112.1
M8: J2.8 JP_MIPS8.1 R83.2 R84.1 R85.1
M9: J2.9 JP_MIPS10.1 R101.2 R102.1 R103.1
M10: J2.10 JP_MIPS6.1 R65.2 R66.1 R67.1
M11: J2.11 JP_MIPS4.1 R47.2 R48.1 R49.1
M12: J2.12 JP_MIPS9.1 R92.2 R93.1 R94.1
M13: J2.13 JP_MIPS7.1 R74.2 R75.1 R76.1
M14: J2.14 JP_MIPS5.1 R56.2 R57.1 R58.1
M15: J2.15 JP_MIPS3.1 R38.2 R39.1 R40.1
M16: J2.16 JP_MIPS2.1 R29.2 R30.1 R31.1
M17: J2.17 J5.3 J6.1 M1.1
N$2: P3.2 R18.2
N$3: R18.1 U3.2
N$4: R19.2 U3.3
N$5: R20.1 U7.6
N$6: P4.2 R22.1
N$7: R22.2 U7.2
N$8: R8.2 U5.2
N$9: R30.2 U7.3
N$10: R9.2 U5.3
N$11: ENBL1.1 R12.1 U5.6
N$12: J6.2 J6.4 R9.1 R15.1
N$13: J5.2 J5.4 R8.1 R14.1
N$14: R14.2 U6.2
N$15: R15.2 U6.3
N$16: R16.2 U4.1
N$17: R29.1 U3.6
N$18: R32.1 U3.8
N$19: P5.2 R33.2
N$20: R33.1 U8.2
N$21: R34.2 U8.3
N$22: C32.- R23.1 R24.2 U10.1
N$23: C28.+ D4.A IC3.1 R25.1 R26.2
N$24: C31.+ D8.A IC4.1 R27.1 R28.2
N$25: POW4.1 U9.4
N$26: -V_IN1.1 C24.1 C33.- U9.2 U10.4
N$35: R35.1 U11.6
N$36: P6.2 R37.1
N$37: R37.2 U11.2
N$38: R39.2 U11.3
N$39: R38.1 U8.6
N$40: R41.1 U8.8
N$41: P7.2 R42.2
N$42: R42.1 U12.2
N$43: R43.2 U12.3
N$44: R44.1 U13.6
N$45: P8.2 R46.1
N$46: R46.2 U13.2
N$47: R48.2 U13.3
N$48: R47.1 U12.6
N$49: R50.1 U12.8
N$50: P9.2 R51.2
N$51: R51.1 U14.2
N$52: R52.2 U14.3
N$53: R53.1 U15.6
N$54: P10.2 R55.1
N$55: R55.2 U15.2
N$56: R57.2 U15.3
N$57: R56.1 U14.6
N$58: R59.1 U14.8
N$59: P11.2 R60.2
N$60: R60.1 U16.2
N$61: R61.2 U16.3
N$62: R62.1 U17.6
N$63: P12.2 R64.1
N$64: R64.2 U17.2
N$65: R66.2 U17.3
N$66: R65.1 U16.6
N$67: R68.1 U16.8
N$68: P13.2 R69.2
N$69: R69.1 U18.2
N$70: R70.2 U18.3
N$71: R71.1 U19.6
N$72: P14.2 R73.1
N$73: R73.2 U19.2
N$74: R75.2 U19.3
N$75: R74.1 U18.6
N$76: R77.1 U18.8
N$77: P15.2 R78.2
N$78: R78.1 U20.2
N$79: R79.2 U20.3
N$80: R80.1 U21.6
N$81: P16.2 R82.1
N$82: R82.2 U21.2
N$83: R84.2 U21.3
N$84: R83.1 U20.6
N$85: R86.1 U20.8
N$86: P17.2 R87.2
N$87: R87.1 U22.2
N$88: R88.2 U22.3
N$89: R89.1 U23.6
N$90: P18.2 R91.1
N$91: R91.2 U23.2
N$92: R93.2 U23.3
N$93: R92.1 U22.6
N$94: R95.1 U22.8
N$95: P19.2 R96.2
N$96: R96.1 U24.2
N$97: R97.2 U24.3
N$98: R98.1 U25.6
N$99: P20.2 R100.1
N$100: R100.2 U25.2
N$101: R102.2 U25.3
N$102: R101.1 U24.6
N$103: R104.1 U24.8
N$104: P21.2 R105.2
N$105: R105.1 U26.2
N$106: R106.2 U26.3
N$107: R107.1 U27.6
N$108: P22.2 R109.1
N$109: R109.2 U27.2
N$110: R111.2 U27.3
N$111: R110.1 U26.6
N$112: R113.1 U26.8
N$113: P23.2 R114.2
N$114: R114.1 U28.2
N$115: R115.2 U28.3
N$116: R116.1 U29.6
N$117: P24.2 R118.1
N$118: R118.2 U29.2
N$119: R120.2 U29.3
N$120: R119.1 U28.6
N$121: R122.1 U28.8
N$122: P25.2 R123.2
N$123: R123.1 U30.2
N$124: R124.2 U30.3
N$125: R125.1 U31.6
N$126: P26.2 R127.1
N$127: R127.2 U31.2
N$128: R129.2 U31.3
N$129: R128.1 U30.6
N$130: R131.1 U30.8
N$131: P27.2 R132.2
N$132: R132.1 U32.2
N$133: R133.2 U32.3
N$134: R134.1 U33.6
N$135: P28.2 R136.1
N$136: R136.2 U33.2
N$137: R138.2 U33.3
N$138: R137.1 U32.6
N$139: R140.1 U32.8
N$140: P29.2 R141.2
N$141: R141.1 U34.2
N$142: R142.2 U34.3
N$143: R143.1 U35.6
N$144: P30.2 R145.1
N$145: R145.2 U35.2
N$146: R147.2 U35.3
N$147: R146.1 U34.6
N$148: R149.1 U34.8
N$149: P31.2 R150.2
N$150: R150.1 U36.2
N$151: R151.2 U36.3
N$152: R152.1 U37.6
N$153: P32.2 R154.1
N$154: R154.2 U37.2
N$155: R156.2 U37.3
N$156: R155.1 U36.6
N$157: R158.1 U36.8
N$158: P33.2 R159.2
N$159: R159.1 U38.2
N$160: R160.2 U38.3
N$161: R161.1 U39.6
N$162: P34.2 R163.1
N$163: R163.2 U39.2
N$164: R165.2 U39.3
N$165: R164.1 U38.6
N$166: R167.1 U38.8

## Tracks (layer width: path | path; a pad name or v marks a point on that pad's centre or on a via)
+1.5V  (via drill 0.35)
  Top 0.152: U6.7 40.01,185.29 v39.12,184.4 37.85,183.13 37.53,183.13 C12.2 C11.2 | v38.1,187.45 38.03,187.52 U4.2 40.11,188.7 41.15,189.74 41.15,191.26 v44.96,191.26 | v58.17,191.26 58.42,191.26 59.44,192.28 +1.5V1.1 | 160.91,172.59 D3.A 160.78,178.31 161.04,178.56 161.04,178.96 IC3.4 161.68,178.31 169.62,178.31 C27.+ | 160.91,172.59 161.04,172.47 161.04,170.18 | R25.2 156.15,172.59 160.91,172.59 | C13.2 40.83,137.99 40.39,138.43 40.39,142.11 | 40.39,142.11 U3.7 | 40.39,142.11 40.39,143.51 40.83,143.95 C5.2 40.83,150.18 39.88,151.13 39.88,153.07 P3.1 41.62,153.2 v42.67,152.15 | 61.98,153.73 61.98,157.23 61.21,157.99 P1.5V1.1 v57.91,157.99 | 61.98,153.73 61.98,153.07 P4.1 | C17.2 101.03,138.5 100.58,138.94 100.58,142.62 | 100.58,142.62 U8.7 | 100.58,142.62 100.58,144.02 101.03,144.46 C15.2 101.03,149.45 | 101.03,149.45 101.03,150.69 100.08,151.64 100.08,153.58 P5.1 101.82,153.71 v102.87,152.65 | P6.1 122.17,153.58 122.17,157.73 121.41,158.5 P1.5V2.1 120.17,158.5 | v118.11,158.5 120.17,158.5 | C36.2 162.49,138.75 162.05,139.19 162.05,142.88 | 162.05,142.88 U14.7 | 162.05,142.88 162.05,144.27 162.49,144.71 C23.2 162.49,150.94 161.54,151.89 161.54,153.83 P9.1 163.29,153.96 v164.34,152.91 | P1.5V4.1 182.88,158.75 183.64,157.99 183.64,154.53 | 183.64,154.53 183.64,153.83 P10.1 | v179.58,158.75 P1.5V4.1 | C44.2 221.42,138.24 220.98,138.68 220.98,142.37 | 220.98,142.37 U18.7 | 220.98,142.37 220.98,143.76 221.42,144.21 C42.2 221.42,146.59 | 221.42,146.59 221.42,150.43 220.47,151.38 220.47,153.32 P13.1 222.21,153.45 v223.27,152.4 | P14.1 242.57,153.32 242.57,157.48 241.81,158.24 P1.5V6.1 v238.51,158.24
  Top 0.152: C52.2 43.37,98.87 42.93,99.31 42.93,103 | 42.93,103 U22.7 | 42.93,103 42.93,104.39 43.37,104.84 C50.2 43.37,111.06 42.42,112.01 42.42,113.95 P17.1 44.16,114.08 v45.21,113.03 | 63.98,118.65 63.75,118.87 P1.5V8.1 v60.45,118.87 | 63.98,118.65 64.52,118.11 64.52,113.95 P18.1 | 102.87,100.71 102.87,97.03 103.31,96.59 C21.2 104.3,95 v104.62,94.68 | 102.87,100.71 U12.7 | 102.87,100.71 102.87,102.11 103.31,102.55 C19.2 103.31,108.78 102.36,109.73 102.36,111.67 P7.1 | 124.46,112.3 124.46,115.82 123.7,116.59 P1.5V3.1 v120.4,116.59 | 124.46,112.3 124.46,111.67 P8.1 | P7.1 104.1,111.8 v105.16,110.74 | C40.2 165.03,98.62 164.59,99.06 164.59,102.74 | 164.59,102.74 U16.7 | 164.59,102.74 164.59,104.14 165.03,104.58 C38.2 165.03,106.9 | 165.03,106.9 165.03,110.81 164.08,111.76 164.08,113.7 P11.1 165.83,113.83 v166.88,112.78 | 186.18,114.36 186.18,117.86 185.42,118.62 P1.5V5.1 v182.12,118.62 | 186.18,114.36 186.18,113.7 P12.1 | C56.2 224.98,101.67 224.54,102.11 224.54,105.79 | 224.54,105.79 U24.7 | 224.54,105.79 224.54,107.19 224.98,107.63 C54.2 224.98,112.62 | 224.98,112.62 224.98,113.86 224.03,114.81 224.03,116.75 P19.1 225.77,116.88 v226.82,115.82 | P20.1 246.13,116.75 246.13,120.9 245.36,121.67 P1.5V9.1 v242.06,121.67 | 40.64,60.33 40.64,56.64 41.08,56.2 C48.2 41.12,54.52 42.39,54.52 v44.29,52.61 | 40.64,60.33 U20.7 | 40.64,60.33 40.64,61.72 41.08,62.16 C46.2 41.08,68.39 40.13,69.34 40.13,71.28 P15.1 41.87,71.41 v42.93,70.36 | P16.1 62.23,71.28 62.23,75.44 61.47,76.2 P1.5V7.1 v58.17,76.2 | C60.2 100.52,56.45 100.08,56.9 | 100.08,56.9 100.08,60.58 | 100.08,60.58 U26.7 | 100.08,60.58 100.08,61.98 100.52,62.42 C58.2 100.52,68.65 99.57,69.6 99.57,71.53 P21.1 101.31,71.66 v102.36,70.61
  Top 0.152: P1.5V10.1 120.9,76.45 121.67,75.69 121.67,71.53 P22.1 | v117.6,76.45 P1.5V10.1 | C64.2 41.59,20.39 41.15,20.83 41.15,24.51 | 41.15,24.51 U28.7 | 41.15,24.51 41.15,25.91 41.59,26.35 C62.2 41.59,32.58 40.64,33.53 40.64,35.47 P23.1 42.38,35.6 v43.43,34.54 | 61.91,40.39 P1.5V11.1 v58.67,40.39 | 61.91,40.39 61.98,40.39 62.74,39.62 62.74,36.1 | 62.74,36.1 62.74,35.47 P24.1 | C68.2 100.52,20.39 100.08,20.83 100.08,24.51 | 100.08,24.51 U30.7 | 100.08,24.51 100.08,25.91 100.52,26.35 C66.2 100.52,31.34 | 100.52,31.34 100.52,32.58 99.57,33.53 99.57,35.47 P25.1 101.31,35.6 v102.36,34.54 | P26.1 121.67,35.47 121.67,39.62 120.9,40.39 P1.5V12.1 v117.6,40.39 | C72.2 165.29,58.48 | 165.29,58.48 165.29,58.99 164.85,59.44 164.85,63.12 | 164.85,63.12 U32.7 | 164.85,63.12 164.85,64.52 165.29,64.96 C70.2 165.29,71.19 164.34,72.14 164.34,74.07 P27.1 166.08,74.2 v167.13,73.15 | 185.88,78.79 185.67,78.99 P1.5V13.1 v182.37,78.99 | 185.88,78.79 186.44,78.23 186.44,74.07 P28.1 | C76.2 224.22,58.99 223.77,59.44 223.77,63.12 | 223.77,63.12 U34.7 | 223.77,63.12 223.77,64.52 224.22,64.96 C74.2 224.22,67.37 | 224.22,67.37 224.22,71.19 223.27,72.14 223.27,74.07 P29.1 225.01,74.2 v226.06,73.15 | P30.1 245.36,74.07 245.36,78.23 244.6,78.99 P1.5V14.1 v241.3,78.99 | C80.2 166.3,22.42 165.86,22.86 165.86,26.54 | 165.86,26.54 U36.7 | 165.86,26.54 165.86,27.94 166.3,28.38 C78.2 166.3,34.61 165.35,35.56 165.35,37.5 P31.1 167.1,37.63 v168.15,36.58 | 187.45,38.16 187.45,41.66 186.69,42.42 P1.5V15.1 v183.39,42.42 176.37,49.44 v176.37,50.86 | 187.45,38.16 187.45,37.5 P32.1 | C84.2 223.96,22.42 223.52,22.86 223.52,26.54
  Top 0.152: 223.52,26.54 U38.7 | 223.52,26.54 223.52,27.94 223.96,28.38 C82.2 223.96,33.4 | 223.96,33.4 223.96,34.61 223.01,35.56 223.01,37.5 P33.1 224.75,37.63 v225.81,36.58 | P34.1 245.11,37.5 245.11,41.66 244.35,42.42 P1.5V16.1 v241.05,42.42 | 61.98,153.73 83.66,153.73 91.44,145.95 | 91.44,145.95 92.87,144.53 96.04,144.53 100.97,149.45 101.03,149.45 | 76.68,131.19 64.14,118.65 63.98,118.65 | 76.68,131.19 91.44,145.95 | 221.42,146.59 217.33,146.59 214.95,144.21 213.36,144.21 203.04,154.53 183.64,154.53 | P1.5V4.1 187.23,164.12 187.23,168.94 191.13,172.85 +1.5V3.1 | v120.17,188.34 120.17,158.5 | 186.18,114.36 210.19,114.36 216.06,108.49 | 216.06,108.49 216.85,107.7 220.03,107.7 224.95,112.62 224.98,112.62 | 187.45,38.16 206.06,38.16 215.74,28.48 219.07,28.48 224,33.4 223.96,33.4 | v166.53,57.21 165.26,58.48 165.29,58.48 | 194.31,86.74 186.37,78.8 185.9,78.8 185.88,78.79 | 194.31,86.74 216.06,108.49 | 224.22,67.37 220.19,67.37 217.81,64.99 216.06,64.99 194.31,86.74 | 62.74,36.1 82.71,36.1 92.39,26.42 95.57,26.42 100.49,31.34 100.52,31.34 | v100.01,50.86 100.01,56.9 100.08,56.9 | 61.91,40.39 v52.86,49.44 | v110.65,88.65 110.33,88.33 110.33,86.58 120.49,76.42 P1.5V10.1 | 165.03,106.9 160.81,106.9 158.59,104.68 156.84,104.68 149.22,112.3 124.46,112.3 | 76.68,131.19 93.34,114.52 98.11,114.52 99.38,115.79 99.85,115.79 102.55,113.09 102.55,111.82 P7.1 | 147.32,188.4 147.95,189.04 D4.C 148.27,189.36 148.59,189.67 148.59,189.74
  Top 0.406: +1.5V1.1 v62.23,193.29 | v148.59,192.02 148.59,189.74
  Top 0.61: 147.32,188.4 147.32,172.47 149.61,170.18 161.04,170.18 171.7,170.18 176.28,174.75 189.23,174.75 191.13,172.85
  Bottom 0.152: v38.1,187.45 38.1,185.42 | v57.91,157.99 57.91,157.73 56.13,155.96 53.09,155.96 49.28,152.15 v42.67,152.15 | v118.11,158.5 118.11,158.24 116.33,156.46 113.28,156.46 109.47,152.65 v102.87,152.65 | v179.58,158.75 179.58,158.5 177.8,156.72 174.75,156.72 170.94,152.91 v164.34,152.91 | v238.51,158.24 238.51,157.99 236.73,156.21 233.68,156.21 229.87,152.4 v223.27,152.4 | v60.45,118.87 60.45,118.62 58.67,116.84 55.63,116.84 51.82,113.03 v45.21,113.03 | v120.4,116.59 120.4,116.33 118.62,114.55 115.57,114.55 111.76,110.74 v105.16,110.74 | v182.12,118.62 182.12,118.36 180.34,116.59 177.29,116.59 173.48,112.78 v166.88,112.78 | v242.06,121.67 242.06,121.41 240.28,119.63 237.24,119.63 233.43,115.82 v226.82,115.82 | v58.17,76.2 58.17,75.95 56.39,74.17 53.34,74.17 49.53,70.36 v42.93,70.36 | v117.6,76.45 117.6,76.2 115.82,74.42 112.78,74.42 108.97,70.61 v102.36,70.61 | v58.67,40.39 58.67,40.13 56.9,38.35 53.85,38.35 50.04,34.54 v43.43,34.54 | v117.6,40.39 117.6,40.13 115.82,38.35 112.78,38.35 108.97,34.54 v102.36,34.54 100.01,36.89 96.04,36.89 94.93,38 94.93,45.78 v100.01,50.86 | v182.37,78.99 182.37,78.74 180.59,76.96 177.55,76.96 173.74,73.15 v167.13,73.15 | v241.3,78.99 241.3,78.74 239.52,76.96 236.47,76.96 232.66,73.15 v226.06,73.15 | v183.39,42.42 183.39,42.16 181.61,40.39 178.56,40.39 174.75,36.58 v168.15,36.58 | v241.05,42.42 241.05,42.16 239.27,40.39 236.22,40.39 232.41,36.58 v225.81,36.58 | v176.37,50.86 170.02,57.21 v166.53,57.21 | v44.29,52.61 47.47,49.44 v52.86,49.44 | v110.65,88.65 v104.62,94.68
  Bottom 0.203: 38.1,185.42 v39.12,184.4 | v44.96,191.26 v58.17,191.26
  Bottom 0.406: v62.23,193.29 65.53,193.29 70.1,188.72 119.79,188.72 v120.17,188.34 125.38,183.13 138.43,183.13 147.32,192.02 v148.59,192.02
+3V  (via drill 0.35)
  Top 0.152: 62.48,182.37 62.23,182.63 62.23,186.62 C8.2 62.16,188.15 63.25,189.23 68.58,189.23 71.88,192.53 71.88,195.33 70.36,196.85 70.1,196.85 | U5.7 64.57,182.37 62.48,182.37 | 62.48,182.37 62.42,182.31 C7.2 62.55,177.23 62.55,176.59 v61.91,175.96 | 173.48,168.91 173.2,168.91 173.2,158.97 P3V4.1 172.97,155.19 v176.02,155.19 | 160.02,206.39 IC4.4 164.2,206.39 165.1,205.49 169.11,205.49 C30.+ | 160.02,200.15 D7.A 155.51,199.9 R27.2 | U7.7 66.67,142.11 | 66.67,142.11 68.2,142.11 68.83,141.48 68.39,141.48 C6.1 68.14,144.53 C14.1 67.56,145.1 v67.56,148.84 | P3V1.1 51.31,154.43 v54.36,154.43 | U11.7 126.84,142.62 | 126.84,142.62 128.4,142.62 129.03,141.99 128.59,141.99 C16.1 128.34,145.03 C18.1 127.76,145.61 v127.76,149.35 | P3V2.1 111.51,154.94 v114.55,154.94 | U15.7 187.17,142.88 | 187.17,142.88 189.87,142.88 190.5,142.24 190.06,142.24 C35.1 189.8,145.29 C37.1 189.23,145.86 v189.23,149.61 | U19.7 246.06,142.37 | 246.06,142.37 248.79,142.37 249.43,141.73 248.99,141.73 C43.1 248.73,144.78 C45.1 248.16,145.35 v248.16,149.1 | P3V6.1 231.9,154.69 v234.95,154.69 | U23.7 69.37,103 | 69.37,103 70.74,103 71.37,102.36 70.93,102.36 C51.1 70.68,105.41 C53.1 70.1,105.98 v70.1,109.73 | v56.9,115.32 53.85,115.32 P3V8.1 53.98,118.97 57.94,118.97 66.67,127.7 72.55,127.7 73.98,129.13 73.98,134.84 66.67,142.14 66.67,142.11 | U13.7 129.22,100.71 | 129.22,100.71 130.68,100.71 131.32,100.08 130.88,100.08 C20.1 130.62,103.12 C22.1 130.05,103.7 v130.05,107.44 | v116.84,113.03 113.79,113.03 P3V3.1 117.79,116.59 129.54,128.33 131.44,128.33 134.14,131.03 134.14,135.32 126.84,142.62
  Top 0.152: U17.7 190.82,102.74 | 190.82,102.74 192.41,102.74 193.04,102.11 192.6,102.11 C39.1 192.34,105.16 C41.1 191.77,105.73 v191.77,109.47 | v178.56,115.06 175.51,115.06 P3V5.1 175.58,118.65 v186.85,129.92 | U25.7 252.35,105.79 252.98,105.16 252.73,105.16 | 252.73,105.16 252.54,105.16 C55.1 | C55.1 252.29,108.2 C57.1 251.71,108.78 v251.71,112.52 | v238.51,118.11 235.46,118.11 P3V9.1 235.59,121.67 v246.06,132.14 | U21.7 66.83,60.33 | 66.83,60.33 68.45,60.33 69.09,59.69 68.65,59.69 C47.1 68.39,62.74 C49.1 67.82,63.31 v67.82,67.06 67.94,67.06 76.52,75.63 76.52,95.79 69.37,102.93 69.37,103 | P3V7.1 51.56,72.64 v54.61,72.64 | U27.7 126.37,60.58 | 126.37,60.58 127.89,60.58 128.52,59.94 128.08,59.94 C59.1 127.83,62.99 C61.1 127.25,63.57 v127.25,67.31 136.37,76.42 136.37,93.57 129.22,100.71 | P3V10.1 111,72.9 v114.05,72.9 | U29.7 68.96,24.51 69.6,23.88 69.15,23.88 C63.1 68.9,26.92 C65.1 68.33,27.5 v68.33,31.24 | P3V11.1 52.07,36.83 v55.12,36.83 | U31.7 127.89,24.51 128.52,23.88 128.08,23.88 C67.1 127.83,26.92 C69.1 127.25,27.5 v127.25,31.24 127.32,31.34 133.67,37.69 133.67,53.25 126.37,60.55 126.37,60.58 | P3V12.1 111,36.83 v114.05,36.83 | U33.7 191.13,63.12 | 191.13,63.12 192.66,63.12 193.29,62.48 192.85,62.48 C71.1 192.6,65.53 C73.1 192.02,66.11 v192.02,69.85 | v178.82,75.44 175.77,75.44 P3V13.1 175.89,79.12 179.86,79.12 189.87,89.12 195.74,89.12 196.85,90.23 196.85,96.74 190.82,102.78 190.82,102.74 | U35.7 250.19,63.12 | 250.19,63.12 251.59,63.12 252.22,62.48 251.78,62.48 C75.1 251.53,65.53 C77.1 250.95,66.11 v250.95,69.85 | v237.74,75.44 234.7,75.44 P3V14.1 234.63,79.12 v247.02,91.5
  Top 0.152: U37.7 193.68,26.54 194.31,25.91 193.87,25.91 C79.1 193.61,28.96 C81.1 193.04,29.53 v193.04,33.27 | P3V15.1 176.78,38.86 v179.83,38.86 | U39.7 251.33,26.54 251.97,25.91 251.53,25.91 C83.1 251.27,28.96 C85.1 250.7,29.53 v250.7,33.27 | P3V16.1 234.44,38.86 v237.49,38.86 | 246.06,142.37 v246.06,141.83 | 250.19,63.12 v250.19,61.98 | 191.13,63.12 v191.13,61.98 | 252.73,105.16 252.73,100.87 253.05,100.55 v253.05,97.54 | 252.73,105.16 C55.1 | v68.58,52.61 69.06,53.09 69.06,58.17 66.83,60.39 66.83,60.33 | v126.68,151.67 139.64,151.67 156.84,168.88 156.84,168.91 | 187.17,142.88 v187.17,142.3
  Top 0.406: 160.02,200.15 160.02,206.39
  Top 0.508: D7.A 157.99,197.61 147.83,197.61 | 70.36,196.85 135.35,196.85
  Top 0.61: +3V1.1 53.85,196.85 70.1,196.85 | 173.48,168.91 +3V.1 | 173.2,168.91 156.84,168.91 149.1,168.91 145.8,172.21 145.8,195.58 147.83,197.61 145.8,199.64 145.8,203.42 | D8.C 145.8,214.63 145.8,203.42 | 145.8,203.42 142.24,203.42 135.67,196.85 135.35,196.85
  Bottom 0.152: v54.36,154.43 54.36,152.65 55.88,151.13 66.55,151.13 67.56,150.11 v67.56,148.84 | v114.55,154.94 114.55,153.16 116.08,151.64 126.68,151.64 | v127.76,149.35 127.76,150.62 126.75,151.64 126.68,151.64 | v176.02,155.19 176.02,153.42 177.55,151.89 188.21,151.89 189.23,150.88 v189.23,149.61 | v234.95,154.69 234.95,152.91 236.47,151.38 247.14,151.38 248.16,150.37 v248.16,149.1 | v56.9,115.32 56.9,113.54 58.42,112.01 69.09,112.01 70.1,111 v70.1,109.73 | v116.84,113.03 116.84,111.25 118.36,109.73 129.03,109.73 130.05,108.71 v130.05,107.44 | v178.56,115.06 178.56,113.28 180.09,111.76 190.75,111.76 191.77,110.74 v191.77,109.47 | v238.51,118.11 238.51,116.33 240.03,114.81 250.7,114.81 251.71,113.79 v251.71,112.52 | v54.61,72.64 54.61,70.87 56.13,69.34 66.8,69.34 67.82,68.33 v67.82,67.06 | v114.05,72.9 114.05,71.12 115.57,69.6 126.24,69.6 127.25,68.58 v127.25,67.31 | v55.12,36.83 55.12,35.05 56.64,33.53 67.31,33.53 68.33,32.51 v68.33,31.24 | v114.05,36.83 114.05,35.05 115.57,33.53 126.24,33.53 127.25,32.51 v127.25,31.24 | v178.82,75.44 178.82,73.66 180.34,72.14 191.01,72.14 192.02,71.12 v192.02,69.85 | v237.74,75.44 237.74,73.66 239.27,72.14 249.94,72.14 250.95,71.12 v250.95,69.85 | v179.83,38.86 179.83,37.08 181.36,35.56 192.02,35.56 192.58,35 | 192.58,35 193.04,34.54 v193.04,33.27 | v237.49,38.86 237.49,37.08 239.01,35.56 249.68,35.56 250.7,34.54 v250.7,33.27 | v246.06,141.83 v246.06,132.14 | v250.19,61.98 250.19,58.17 P3V16.1 231.71,45.15 203.04,45.15 192.88,34.99 192.56,34.99 192.58,35 | v191.13,61.98 191.13,56.74 176.85,42.45 P3V15.1 | v247.02,91.5 v253.05,97.54
  Bottom 0.152: P3V11.1 64.29,52.61 v68.58,52.61 | v61.91,175.96 61.91,168.5 51.44,158.02 P3V1.1 | v126.68,151.67 126.68,151.64 | v186.85,129.92 186.85,142.3 v187.17,142.3
-1.5V  (via drill 0.35)
  Top 0.152: 46.48,187.83 51.37,187.83 C9.1 C10.1 51.37,190.06 56.9,195.58 64.52,195.58 | 46.48,187.83 U6.4 | -1.5V1.1 67.82,195.58 64.52,195.58 | U6.8 42.55,184.02 43.94,185.42 43.94,187.45 44.2,187.71 46.36,187.71 46.48,187.83 | 186.96,181.73 188.33,181.73 189.93,183.32 C25.1 200.13,183.32 R23.2 -1.5V3.1 200.15,168.15 N1.5V4.1 v186.69,158.75 | 64.52,195.58 v64.52,192.02 | 187.39,181.3 187.14,181.55 | 185.67,181.73 U10.3 | U3.4 38.61,138.38 38.61,135.89 38.93,136.21 C13.1 38.89,136.11 38.89,134.84 v41.27,132.46 | U3.4 38.73,139.57 39.12,139.95 39.12,145.1 C5.1 | U3.4 36.52,138.68 v35.56,138.68 | v34.04,152.15 34.54,152.65 37.34,152.65 37.34,153.07 P3.3 37.08,153.32 v37.08,156.46 | v65.02,157.99 N1.5V1.1 | U8.4 98.81,138.89 98.81,136.4 99.13,136.72 C17.1 | U8.4 98.93,140.08 99.31,140.46 99.31,145.61 C15.1 | U8.4 96.72,139.19 v95.76,139.19 | v94.23,152.65 94.74,153.16 97.54,153.16 97.54,153.58 P5.3 97.28,153.83 v97.28,156.97 | v125.22,158.5 N1.5V2.1 | U14.4 160.27,139.14 160.27,136.65 160.59,136.97 C36.1 | U14.4 160.4,140.33 160.78,140.72 160.78,145.86 C23.1 | U14.4 158.19,139.45 v157.23,139.45 | v155.7,152.91 156.21,153.42 159,153.42 159,153.83 P9.3 158.75,154.08 v158.75,157.23 | U18.4 219.2,138.63 219.2,136.14 219.52,136.46 C44.1 | U18.4 219.33,139.83 219.71,140.21 219.71,145.35 C42.1 | U18.4 217.12,138.94 v216.15,138.94 | v214.63,152.4 215.14,152.91 217.93,152.91 217.93,153.32 P13.3 217.68,153.58 v217.68,156.72 | v245.62,158.24 N1.5V6.1 | U22.4 41.15,99.26 41.15,96.77 41.43,97.06 | 41.43,97.06 41.47,97.09 C52.1 41.43,97.06 | U22.4 41.27,100.46 41.66,100.84 41.66,105.98 C50.1
  Top 0.152: U22.4 39.06,99.57 v38.1,99.57 | v36.58,113.03 37.08,113.54 39.88,113.54 39.88,113.95 P17.3 39.62,114.21 v39.62,117.35 | v67.56,118.87 N1.5V8.1 71.75,118.97 85.88,118.97 93.98,110.87 96.52,110.87 v96.52,110.74 97.03,111.25 99.82,111.25 99.82,111.67 P7.3 99.57,111.92 v99.57,115.06 | U12.4 101.09,96.98 101.09,94.49 101.41,94.81 C21.1 | U12.4 101.22,98.17 101.6,98.55 101.6,103.7 C19.1 | U12.4 99.01,97.28 v98.04,97.28 | v127.51,116.59 N1.5V3.1 | U16.4 162.81,99.01 162.81,96.52 163.13,96.84 C40.1 | U16.4 162.94,100.2 163.32,100.58 163.32,105.73 C38.1 | U16.4 160.73,99.31 v159.77,99.31 | v158.24,112.78 158.75,113.28 161.54,113.28 161.54,113.7 P11.3 161.29,113.95 v161.29,117.09 | v189.23,118.62 N1.5V5.1 193.36,118.49 205.11,118.49 207.49,116.11 217.81,116.11 218.12,115.79 v218.19,115.82 218.69,116.33 221.49,116.33 221.49,116.75 P19.3 221.23,117 v221.23,120.14 | U24.4 222.76,102.06 222.76,99.57 223.08,99.89 C56.1 | U24.4 222.88,103.25 223.27,103.63 223.27,108.78 C54.1 | U24.4 220.68,102.36 v219.71,102.36 | v249.17,121.67 N1.5V9.1 | U20.4 38.86,56.59 38.86,54.1 39.18,54.42 C48.1 38.89,54.04 v43.02,49.91 | U20.4 38.99,57.78 39.37,58.17 39.37,63.31 C46.1 | U20.4 36.78,56.9 v35.81,56.9 | v34.29,70.36 34.8,70.87 37.59,70.87 37.59,71.28 P15.3 37.34,71.53 v37.34,74.68 | v65.28,76.2 N1.5V7.1 | U26.4 98.3,56.84 98.3,54.36 98.62,54.68 C60.1 | U26.4 98.42,58.04 98.81,58.42 98.81,63.57 C58.1 | U26.4 96.22,57.15 v95.25,57.15 | v93.73,70.61 94.23,71.12 97.03,71.12 97.03,71.53 P21.3 96.77,71.79 v96.77,74.93 | v124.71,76.45 N1.5V10.1 | U28.4 39.37,20.78 39.37,18.29 39.69,18.61 C64.1
  Top 0.152: U28.4 39.5,21.97 39.88,22.35 39.88,27.5 C62.1 | U28.4 37.29,21.08 v36.32,21.08 | v34.8,34.54 35.31,35.05 38.1,35.05 38.1,35.47 P23.3 37.85,35.72 v37.85,38.86 | v65.79,40.39 N1.5V11.1 | U30.4 98.3,20.78 98.3,18.29 98.62,18.61 C68.1 | U30.4 98.42,21.97 98.81,22.35 98.81,27.5 C66.1 | U30.4 96.22,21.08 v95.25,21.08 | v93.73,34.54 94.23,35.05 97.03,35.05 97.03,35.47 P25.3 96.77,35.72 v96.77,38.86 | v124.71,40.39 N1.5V12.1 | U32.4 163.07,59.39 163.07,56.9 163.39,57.22 C72.1 163.04,56.9 164.15,55.78 v164.15,53.4 | U32.4 163.19,60.58 163.58,60.96 163.58,66.11 C70.1 | U32.4 160.99,59.69 v160.02,59.69 | v158.5,73.15 159,73.66 161.8,73.66 161.8,74.07 P27.3 161.54,74.33 v161.54,77.47 | v189.48,78.99 N1.5V13.1 | U34.4 222,59.39 222,56.9 222.32,57.22 C76.1 | U34.4 222.12,60.58 222.5,60.96 222.5,66.11 C74.1 | U34.4 219.91,59.69 v218.95,59.69 | v217.42,73.15 217.93,73.66 220.73,73.66 220.73,74.07 P29.3 220.47,74.33 v220.47,77.47 | v248.41,78.99 N1.5V14.1 | U36.4 164.08,22.81 164.08,20.32 164.4,20.64 C80.1 | U36.4 164.21,24 164.59,24.38 164.59,29.53 C78.1 | U36.4 162,23.11 v161.04,23.11 | v159.51,36.58 160.02,37.08 162.81,37.08 162.81,37.5 P31.3 162.56,37.75 v162.56,40.89 | v190.5,42.42 N1.5V15.1 194.63,42.29 202.41,42.29 209.39,35.31 215.9,35.31 v217.17,36.58 217.68,37.08 220.47,37.08 220.47,37.5 P33.3 220.22,37.75 v220.22,40.89 | U38.4 221.74,22.81 221.74,20.32 222.06,20.64 C84.1 | U38.4 221.87,24 222.25,24.38 222.25,29.53 C82.1 | U38.4 219.66,23.11 v218.69,23.11 | v248.16,42.42 N1.5V16.1 | v44.13,93.25 41.43,95.95 41.43,97.06
  Top 0.61: v187.84,180.85 187.39,181.3 | 187.14,181.55 186.96,181.73 185.67,181.73